# Altium PCB CH32H417MEU6-UHSIF-Bottom-R0.PcbDoc (part 2 of 2)
Units mil, origin at the board's own origin, x right, y up, seen from the top; angles counter-clockwise.
Board outline 2559.06 x 1771.65 mil, 4 copper layers (Top Layer, Layer 1, Layer 2, Bottom Layer), stack 23.756 mil thick; 66 components, 89 nets, 305 pads, 405 vias.
Unrouted connection lines stored in the file: 29.
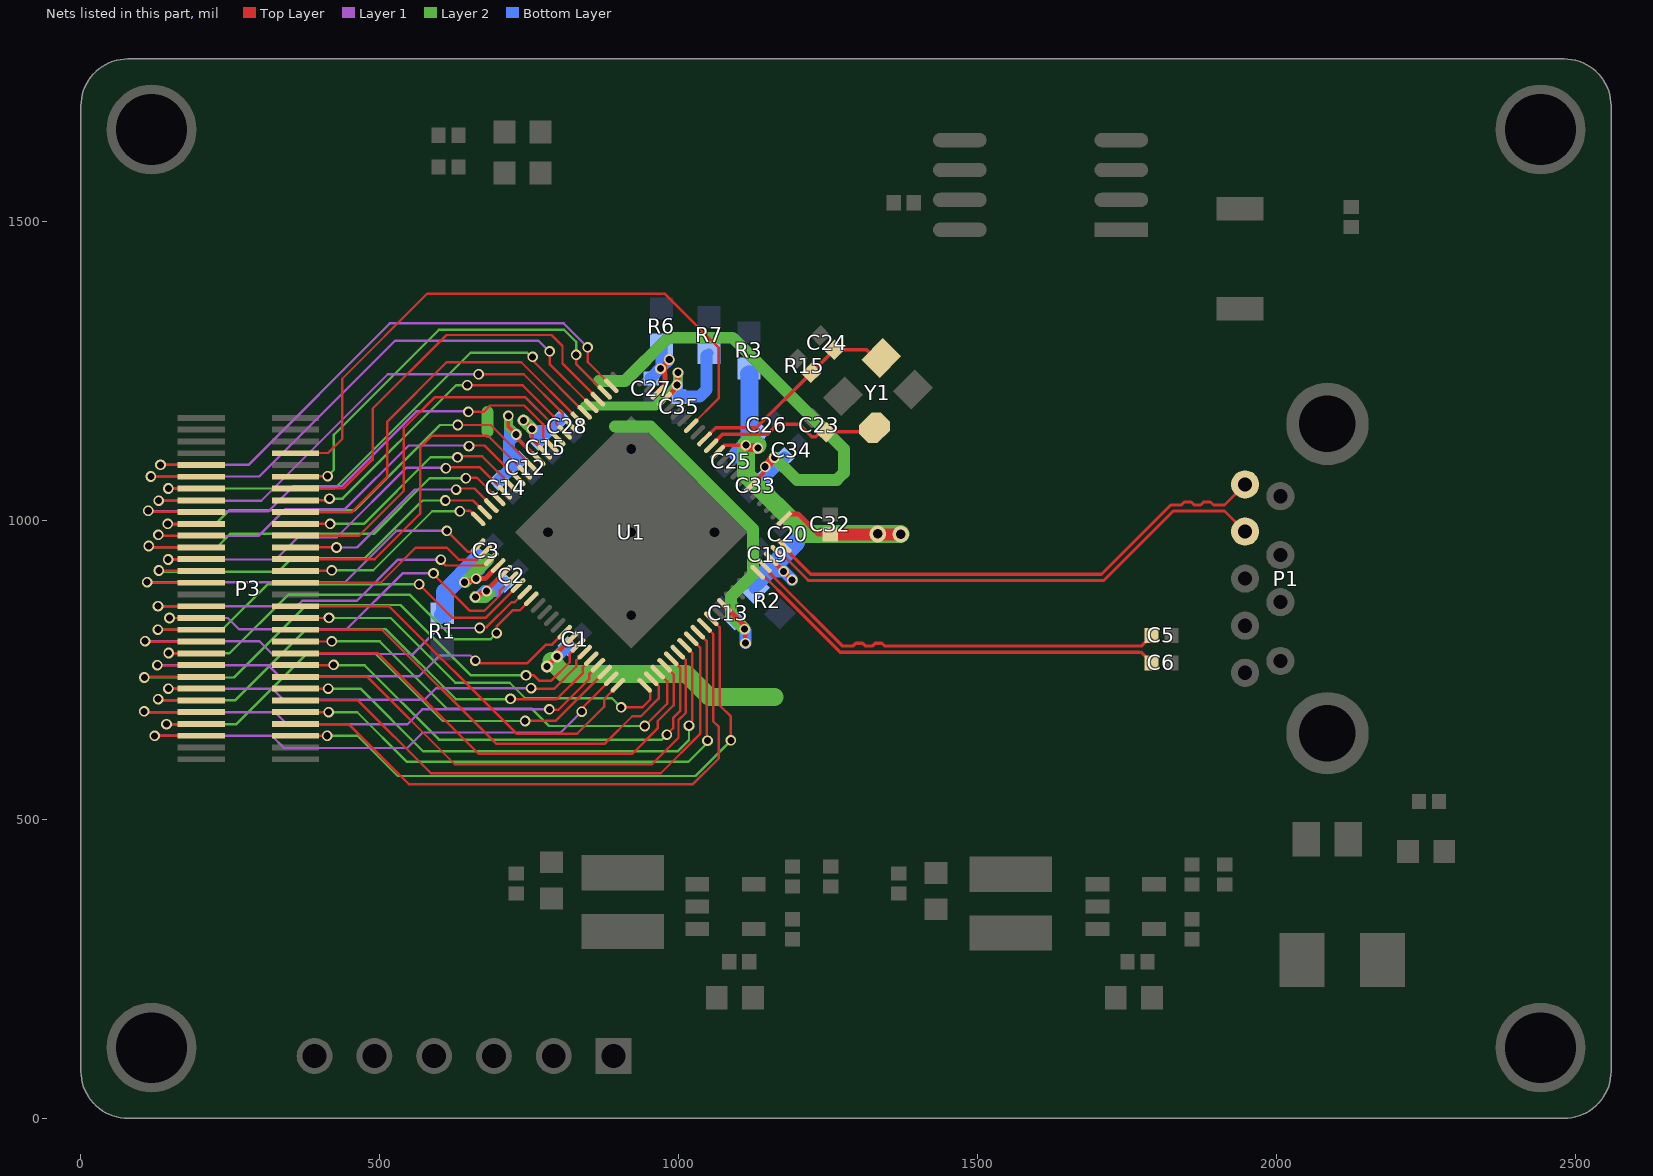
[diagram p4: the nets of this part, all layers, seen from the top]

## Via types
v1: diameter 17.72, hole 11.81, Top Layer to Bottom Layer, tented both sides, 276 vias
v2: diameter 19.68, hole 11.81, Top Layer to Bottom Layer, tented both sides, 94 vias
v3: diameter 28, hole 16, Top Layer to Bottom Layer, tented both sides, 23 vias
v4: diameter 23.62, hole 11.81, Top Layer to Bottom Layer, tented both sides, 12 vias

## Nets (pads, with @x,y where several pads share a name; then routed paths per layer and width w, separated by ;. In a path a pad name is that pad's centre, name@x,y a point inside that pad or via, vN(x,y) a via of type N, cw(c..) or ccw(c..) an arc to the next point about the centre after c; other vN are vias at no path point) (continued)
UFP3: P3.9 U1.24 | length 977.8
  Top Layer w4: v1(133.13,1092.73) 133.35,1092.52 P3.9@201.26,1092.52 ; v1(847.54,1289.26) 847.54,1264.55 U1.24@887,1225.09
  Layer 1 w4: v1(133.13,1092.73) 280.04,1092.73 516.77,1329.46 807.33,1329.46 v1(847.54,1289.26)
UFP4: P3.12 U1.25 | length 718.3
  Top Layer w4: P3.12@358.74,1072.83 359.31,1073.41 412.09,1073.41 v1(412.66,1073.98) ; v1(828.26,1276.76) 828.26,1261.55 U1.25@875.86,1213.96
  Layer 2 w4: v1(412.66,1073.98) 422.78,1084.09 422.78,1142.85 598.47,1318.54 808.31,1318.54 828.26,1298.59 v1(828.26,1276.76)
UFP5: P3.14 U1.26 | length 723.8
  Top Layer w4: P3.14@358.74,1053.15 439.37,1053.15 487.75,1101.54 487.75,1186.46 611.27,1309.97 787.03,1309.97 805.41,1291.6 805.41,1262.13 U1.26@864.72,1202.82
UFP6: P3.11 U1.27 | length 972.7
  Top Layer w4: v1(116.91,1073.29) 200.8,1073.29 P3.11@201.26,1072.83 ; v1(783.78,1282.63) 783.78,1261.5 U1.27@853.59,1191.68
  Layer 1 w4: v1(116.91,1073.29) 298.23,1073.29 525.38,1300.44 765,1300.44 782.81,1282.63 v1(783.78,1282.63)
UFP7: P3.13 U1.28 | length 889.9
  Top Layer w4: v1(146.21,1053.15) P3.13@201.26,1053.15 ; v1(755.45,1273.24) 758.07,1270.62 758.07,1264.93 U1.28@842.45,1180.55
  Layer 2 w4: v1(146.21,1053.15) 424.6,1053.15 651.62,1280.17 746.25,1280.17 753.17,1273.24 v1(755.45,1273.24)
UFP8: P3.18 U1.29 | length 669.5
  Top Layer w4: P3.18@358.74,1013.78 453.07,1013.78 512.46,1073.17 512.46,1165.18 611.56,1264.28 736.45,1264.28 U1.29@831.32,1169.41
UFP9: P3.15 U1.30 | length 888.6
  Top Layer w4: v1(130.07,1032.96) 200.75,1032.96 P3.15@201.26,1033.46 ; v1(665.11,1244.27) 740.53,1244.27 806.09,1178.71 806.09,1172.37 U1.30@820.18,1158.28
  Layer 1 w4: v1(130.07,1032.96) 130.35,1032.67 301.55,1032.67 513.15,1244.27 v1(665.11,1244.27)
UFP10: P3.16 U1.31 | length 567.7
  Top Layer w4: P3.16@358.74,1033.46 406.11,1033.46 406.31,1033.67 413.18,1033.67 v1(415.8,1036.29) ; v1(646.1,1226.01) 738.64,1226.01 795.09,1169.57 795.09,1161.1 U1.31@809.05,1147.14
  Layer 2 w4: v1(415.8,1036.29) 437.75,1036.29 627.47,1226.01 v1(646.1,1226.01)
UFP11: P3.22 U1.32 | length 634.3
  Top Layer w4: P3.22@358.74,974.41 358.97,974.18 465.1,974.18 539.9,1048.98 539.9,1153.93 591.57,1205.6 743.5,1205.6 784.09,1165.01 784.09,1149.83 U1.32@797.91,1136.01
UFP12: P3.17 U1.33 | length 878.4
  Top Layer w4: v1(112.66,1016.02) 114.64,1014.04 P3.17@201,1014.04 ; v1(647.99,1181.43) 673.67,1181.43 684.34,1192.1 741.44,1192.1 773.09,1160.45 773.09,1138.56 U1.33@786.78,1124.87
  Layer 1 w4: v1(112.66,1016.02) 113.74,1014.94 313.26,1014.94 355.15,1056.83 435.67,1056.83 561.01,1182.18 647.24,1182.18 v1(647.99,1181.43)
UFP13: P3.19 U1.36 | length 761.7
  Top Layer w4: v1(145.23,994.01) 145.31,994.09 P3.19@201.26,994.09 ; v1(630.17,1159.4) 685.44,1159.4 U1.36@753.37,1091.47
  Layer 2 w4: v1(145.23,994.01) 146.22,993.03 224.23,993.03 248.31,1017.11 458.36,1017.11 600.64,1159.4 v1(630.17,1159.4)
UFP14: P3.26 U1.37 | length 559.1
  Top Layer w4: P3.26@358.74,935.04 491.33,935.04 567.34,1011.05 567.34,1121.51 587.39,1141.56 680.56,1141.56 741.79,1080.33 U1.37@742.23,1080.33
UFP15: P3.21 U1.38 | length 761.3
  Top Layer w4: v1(129.61,975.67) 130.87,974.41 P3.21@201.26,974.41 ; v1(649.11,1123.94) 650.32,1125.15 675.15,1125.15 U1.38@731.1,1069.19
  Layer 1 w4: v1(129.61,975.67) 131.47,973.81 297.06,973.81 342.06,1018.81 441.92,1018.81 548.25,1125.15 647.9,1125.15 v1(649.11,1123.94)
UFP16: P3.20 U1.39 | length 428.3
  Top Layer w4: P3.20@358.74,994.09 v1(416.84,994.08) ; v1(629.85,1105.35) 631.57,1107.08 670.94,1107.08 U1.39@719.96,1058.06
  Layer 2 w4: v1(416.84,994.08) 473.32,994.08 584.6,1105.35 v1(629.85,1105.35)
UFP17: P3.25 U1.40 | length 700.4
  Top Layer w4: v1(145.93,934.46) 146.51,935.04 P3.25@201.26,935.04 ; v1(610.42,1087.1) 611.74,1088.43 667.32,1088.43 U1.40@708.83,1046.92
  Layer 1 w4: v1(145.93,934.46) 325.93,934.46 363.04,971.56 427.76,971.56 544.44,1088.24 609.28,1088.24 v1(610.42,1087.1)
UFP18: P3.23 U1.41 | length 736.8
  Top Layer w4: v1(113.44,957.05) 115.2,955.28 200.7,955.28 P3.23@201.26,954.72 ; v1(643.87,1070.38) 644.61,1071.12 662.36,1071.12 U1.41@697.69,1035.79
  Layer 2 w4: v1(113.44,957.05) 115.76,954.72 227.09,954.72 249.58,977.22 490.22,977.22 583.24,1070.25 617.4,1070.25 617.53,1070.38 v1(643.87,1070.38)
UFP19: P3.24 U1.42 | length 380.5
  Top Layer w4: P3.24@358.74,954.72 427.23,954.72 v1(427.41,954.55) ; v1(627.48,1051.46) 629.17,1053.14 658.07,1053.14 U1.42@686.56,1024.65
  Layer 1 w4: v1(427.41,954.55) 461.46,954.55 558.37,1051.46 v1(627.48,1051.46)
UFP20: P3.27 U1.43 | length 674.8
  Top Layer w4: v1(130.43,916.12) 131.19,915.35 P3.27@201.26,915.35 ; v1(609.4,1033.21) 655.73,1033.21 U1.43@675.42,1013.52
  Layer 2 w4: v1(130.43,916.12) 132.81,913.73 329.55,913.73 352.87,937.05 474.85,937.05 571.01,1033.21 v1(609.4,1033.21)
UFP21: P3.28 U1.44 | length 352.6
  Top Layer w4: P3.28@358.74,915.35 359.28,915.89 419,915.89 v1(419.54,916.43) ; v1(633.9,1015.13) 634.49,1015.72 650.94,1015.72 U1.44@664.28,1002.38
  Layer 2 w4: v1(419.54,916.43) 488.89,916.43 587.59,1015.13 v1(633.9,1015.13)
UFP22: P3.29 U1.45 | length 699.5
  Top Layer w4: v1(110.65,896.57) 111.55,895.67 P3.29@201.26,895.67 ; v1(611.97,982.42) 647.23,947.15 652.55,947.15 663.24,957.84 U1.45@664.28,957.84
  Layer 1 w4: v1(110.65,896.57) 110.95,896.27 441.3,896.27 527.45,982.42 v1(611.97,982.42)
UFP23: P3.30 U1.46 | length 354.4
  Top Layer w4: P3.30@358.74,895.67 501.44,895.67 559.8,954.03 612.08,954.03 632.13,933.98 662.7,933.98 U1.46@675.42,946.7
UFP24: P3.33 U1.47 | length 672.5
  Top Layer w4: v1(128.86,856.52) 129.07,856.3 P3.33@201.26,856.3 ; v1(602.05,934.38) 602.05,932.18 609.8,924.43 674.37,924.43 685.51,935.57 U1.47@686.56,935.57
  Layer 1 w4: v1(128.86,856.52) 361,856.52 370.07,865.58 461.57,865.58 530.37,934.38 v1(602.05,934.38)
UFP25: P3.35 U1.50 | length 725.6
  Top Layer w4: v1(148.11,836.61) P3.35@201.26,836.61 ; v1(589.69,911.34) 589.69,909.72 650.89,848.53 674.55,848.53 700.77,874.75 700.77,882.97 U1.50@719.96,902.16
  Layer 1 w4: v1(148.11,836.61) 245.6,836.61 264.51,817.71 444.44,817.71 538.07,911.34 v1(589.69,911.34)
UFP26: P3.37 U1.51 | length 752.8
  Top Layer w4: v1(128.58,817.27) 128.92,816.93 P3.37@201.26,816.93 ; v1(565.63,893.09) 621.88,836.84 676.91,836.84 711.77,871.7 U1.51@731.1,891.03
  Layer 2 w4: v1(128.58,817.27) 128.92,816.93 236.17,816.93 312.09,892.85 565.38,892.85 v1(565.63,893.09)
UFP27: P3.39 U1.52 | length 780.7
  Top Layer w4: v1(107.43,797.95) 108.14,797.24 P3.39@201.26,797.24 ; v1(666.98,819.87) 668.47,821.36 678.5,821.36 720.11,862.97 725.32,862.97 U1.52@742.23,879.89
  Layer 1 w4: v1(107.43,797.95) 298.33,797.95 319.92,776.36 555.27,776.36 598.78,819.87 v1(666.98,819.87)
UFP28: P3.41 U1.53 | length 767.1
  Top Layer w4: v1(146.76,778.11) 147.31,777.56 P3.41@201.26,777.56 ; v1(695.23,811.36) 695.71,811.84 695.71,823.02 722.02,849.33 733.94,849.33 U1.53@753.37,868.75
  Layer 2 w4: v1(146.76,778.11) 147.31,777.56 248.44,777.56 346.24,875.36 550.41,875.36 624.36,801.42 685.29,801.42 v1(695.23,811.36)
UFP29: P3.43 U1.58 | length 804.5
  Top Layer w4: v1(127.91,757.71) 128.46,757.16 200.54,757.16 P3.43@201.26,757.87 ; v1(659.72,765.38) 663.1,765.38 667.79,760.69 746.1,760.69 777.53,792.12 788.08,792.12 U1.58@809.05,813.08
  Layer 1 w4: v1(127.91,757.71) 128.07,757.87 313.16,757.87 331.99,739.04 565.13,739.04 600.03,773.94 651.16,773.94 v1(659.72,765.38)
UFP30: P3.45 U1.60 | length 956.8
  Top Layer w4: v1(106.05,737.12) 107.12,738.19 P3.45@201.26,738.19 ; v1(744.33,740.74) 757.67,740.74 767.02,731.39 786.34,731.39 817.45,762.5 817.45,776.94 U1.60@831.32,790.81
  Layer 2 w4: v1(106.05,737.12) 255.93,737.12 377.22,858.41 534.52,858.41 652.19,740.74 v1(744.33,740.74)
UFP31: P3.47 U1.61 | length 798.9
  Top Layer w4: v1(146.24,718.64) 146.38,718.5 P3.47@201.26,718.5 ; v1(752.83,719.22) 753.88,718.17 791.37,718.17 828.45,755.26 828.45,765.67 U1.61@842.45,779.67
  Layer 1 w4: v1(146.24,718.64) 146.43,718.45 320.29,718.45 338.69,700.05 574.7,700.05 593.87,719.22 v1(752.83,719.22)
UFP32: P3.49 U1.62 | length 930.6
  Top Layer w4: v1(129.11,700.82) 131.11,698.82 P3.49@201.26,698.82 ; v1(718.42,701.4) 719.05,700.77 795.31,700.77 839.45,744.91 839.45,754.4 U1.62@853.59,768.53
  Layer 2 w4: v1(129.11,700.82) 131.11,698.82 257.9,698.82 377.38,818.3 509.67,818.3 627.2,700.77 717.78,700.77 v1(718.42,701.4)
UFP33: P3.51 U1.63 | length 910.2
  Top Layer w4: v1(105.8,680.42) 107.09,679.13 P3.51@201.26,679.13 ; v1(783.37,683.81) 783.98,683.19 798.71,683.19 850.45,734.93 850.45,743.13 U1.63@864.72,757.4
  Layer 1 w4: v1(105.8,680.42) 107.09,679.13 324.5,679.13 345.01,658.63 545.65,658.63 570.84,683.81 v1(783.37,683.81)
UFP34: P3.53 U1.64 | length 920.5
  Top Layer w4: v1(143.16,659.17) 200.98,659.17 P3.53@201.26,659.45 ; v1(742.94,664.31) 743.63,665 794.6,665 U1.64@875.86,746.26
  Layer 2 w4: v1(143.16,659.17) 260.19,659.17 378.2,777.18 492.22,777.18 605.09,664.31 v1(742.94,664.31)
UFP35: P3.55 U1.65 | length 901.4
  Top Layer w4: v1(123.27,639.64) 123.4,639.76 P3.55@201.26,639.76 ; v1(837.56,680.14) 840.18,682.76 840.18,687.53 887,734.34 U1.65@887,735.13
  Layer 1 w4: v1(123.27,639.64) 319.08,639.63 339.4,619.31 545.84,619.31 571.64,645.12 802.54,645.12 v1(837.56,680.14)
UFP36: P3.34 U1.66 | length 668.5
  Top Layer w4: P3.34@358.74,856.3 515.46,856.3 728.55,643.2 829.98,643.2 875.21,688.43 875.21,701.07 U1.66@898.13,723.99
UFP37: P3.36 U1.67 | length 688.4
  Top Layer w4: P3.36@358.74,836.61 358.8,836.67 v1(414.83,836.73) v1(414.83,836.73) ; v1(903.38,687.19) 938.68,687.19 952.33,700.84 952.33,711.59 951.77,712.16 951.77,714.9 U1.67@942.67,723.99
  Layer 2 w4: v1(414.83,836.73) 414.95,836.61 518.1,836.61 626.34,728.37 717.19,728.37 743.2,702.36 888.21,702.36 v1(903.38,687.19)
UFP38: P3.38 U1.68 | length 755.8
  Top Layer w4: P3.38@358.74,816.93 503.76,816.93 694.17,626.52 876.43,626.52 922.18,672.27 936.49,672.27 966.13,701.91 966.13,722.81 U1.68@953.81,735.13
UFP39: P3.40 U1.69 | length 755.2
  Top Layer w4: P3.40@358.74,797.24 358.88,797.39 419.34,797.39 v1(419.48,797.53) ; v1(942.98,656) 980.5,693.52 980.5,730.71 U1.69@964.94,746.26
  Layer 2 w4: v1(419.48,797.53) 499.66,797.53 612.65,684.55 754.35,684.55 782.9,656 v1(942.98,656)
UFP40: P3.42 U1.70 | length 816
  Top Layer w4: P3.42@358.74,777.56 496.91,777.56 664.89,609.58 922.34,609.58 964.53,651.77 964.53,663.89 991.5,690.87 991.5,741.98 U1.70@976.08,757.4
UFP41: P3.44 U1.71 | length 819.1
  Top Layer w4: P3.44@358.74,757.87 422.18,757.87 v1(422.63,758.32) ; v1(979.83,641.56) 990.45,652.18 990.45,669.66 1002.5,681.71 1002.5,753.25 U1.71@987.22,768.53
  Layer 2 w4: v1(422.63,758.32) 423.38,757.57 474.49,757.57 598.73,633.34 971.57,633.34 v1(979.83,641.56)
UFP42: P3.46 U1.72 | length 873.3
  Top Layer w4: P3.46@358.74,738.19 479.17,738.19 625.3,592.06 955.12,592.06 999.45,636.39 999.45,665.93 1011.5,677.99 1011.5,766.52 U1.72@998.35,779.67
UFP43: P3.48 U1.73 | length 876.2
  Top Layer w4: P3.48@359.3,717.95 P3.48@358.74,718.5 v1(413.6,718.5) ; U1.73@1009.49,790.81 1022.6,777.69 1022.6,665.71 1016.89,660 v1(1016.89,656.51)
  Layer 2 w4: v1(413.6,718.5) 467.52,718.5 572.44,613.59 997.72,613.59 1016.89,632.76 v1(1016.89,656.51)
UFP44: P3.50 U1.74 | length 919.7
  Top Layer w4: P3.50@358.74,698.82 463.41,698.82 585.24,577 969.61,577 1035.5,642.88 1035.5,787.06 U1.74@1020.62,801.94
UFP45: P3.52 U1.75 | length 928.8
  Top Layer w4: P3.52@358.81,679.2 P3.52@358.74,679.13 v1(414.37,679.13) ; U1.75@1031.76,813.08 1046.5,798.33 1046.5,632.94 v1(1047.97,631.47)
  Layer 2 w4: v1(414.37,679.13) 462.09,679.13 545.31,595.91 1015.8,595.91 1047.97,628.08 v1(1047.97,631.47)
UFP46: P3.54 U1.76 | length 999.6
  Top Layer w4: P3.54@358.74,659.45 P3.54@358.81,659.38 ; P3.54@358.81,658.76 448.35,658.76 548.36,558.75 1023.56,558.75 1066.89,602.07 1066.89,654.09 1057.5,663.47 1057.5,809.6 U1.76@1042.89,824.21
UFP47: P3.56 U1.77 | length 998.1
  Top Layer w4: P3.56@358.74,639.76 v1(411.71,639.76) ; U1.77@1054.03,835.35 1068.5,820.88 1068.5,690.34 1087.07,671.76 v1(1087.07,631.85)
  Layer 2 w4: v1(411.71,639.76) 462.56,639.76 529.93,572.39 1027.61,572.39 v1(1087.07,631.85)
UFPCLK: P3.8 U1.15 | length 1064.3
  Top Layer w4: P3.8@358.74,1112.2 359.16,1112.63 413.51,1112.63 437.08,1136.21 437.08,1236.86 579.35,1379.12 975.75,1379.12 1066.89,1287.98 1066.89,1204.55 U1.15@1020.62,1158.28
USB_SSRX_n: P1.6 U1.87 | length 863.2
  Top Layer w5.1: U1.87@1165.38,946.7 1174.27,937.82 1178.26,937.82 1213.43,902.65 1216.39,899.69 1710.99,899.69 1826.87,1015.57 1912.62,1015.57 P1.6@1946.94,981.25
USB_SSRX_p: P1.5 U1.88 | length 863.1
  Top Layer w5.1: U1.88@1176.52,957.84 1185.4,948.96 1185.4,944.96 1220.58,909.79 1706.8,909.79 1822.69,1025.67 1840.33,1025.67 1845.3,1030.65 1856.82,1030.65 1861.8,1025.67 1872.71,1025.67 1877.69,1030.65 1889.2,1030.65 1894.18,1025.67 1912.62,1025.67 P1.5@1946.94,1059.99
USB_SSTX_n: C6.1 U1.84 | length 719
  Top Layer w5.1: U1.84@1131.98,913.3 1140.86,904.41 1144.85,904.41 1163.38,885.89 1165.47,883.8 1269.92,779.35 1770.48,779.35 ; 1773.44,779.35 1790.41,762.39 C6.1@1790.41,761.4
USB_SSTX_p: C5.1 U1.85 | length 721.6
  Top Layer w5.1: U1.85@1143.11,924.43 1151.99,915.55 1151.99,911.56 1167.56,895.99 1274.1,789.45 1291,789.45 1295.98,794.43 1307.49,794.43 1312.47,789.45 1323.38,789.45 1328.36,794.43 1339.88,794.43 1344.85,789.45 1773.29,789.45 ; 1773.44,789.45 1790.41,806.42 C5.1@1790.41,807.4
VDD12A: C19.2 C20.2 R2.1 U1.86 | length 226.7
  Top Layer w7: U1.86@1154.25,935.57 v1(1175.3,914.52) v1(1189.44,900.37)
  Bottom Layer w20: R2.1@1126.29,886.55 R2.1@1126.29,897.14 ; 1144.37,910.98 1147.91,914.52 v1(1175.3,914.52) ; C19.2@1160.1,930.95 1158.2,929.05 1160.76,929.05 v1(1175.3,914.52) ; v1(1189.44,900.37) v1(1175.3,914.52)
  Bottom Layer w30: R2.1@1128.41,895.02 1144.37,910.98 ; 1147.91,914.52 C19.2@1160.32,926.93 ; C19.2@1162.22,928.82 C20.2@1196.17,962.78
VDD33: C1.1 C25.2 C26.2 C32.2 R3.1 U1.1 U1.11 U1.59 | length 1305
  Top Layer w6: U1.11@1065.16,1113.74 1077.24,1125.81 v1(1111.98,1125.81)
  Top Layer w8: v2@780.81,757.92 781.76,757.92 v2(796.08,772.25) ; U1.59@820.18,801.94 798.32,780.08 v2@798.32,771.18 ; U1.1@1176.52,1002.38 1184.78,1010.64 1199.38,1010.64 1233.49,976.53 C32.2@1253.13,976.53 ; v2@798.28,771.14 v2@798.32,771.18
  Top Layer w15: v1(1111.98,1125.81) 1112.71,1125.81 1117.13,1121.4 1131.61,1121.4 v1(1132.13,1120.88)
  Top Layer w20: C32.2@1253.13,976.53 1299.15,976.53 1370.87,976.53 v3(1371.12,976.78)
  Layer 2 w30: 786.8,764.76 808.33,743.22 1012.64,743.22 1051.29,704.57 1160.07,704.57 ; v1@1131.65,1125.81 v1(1111.98,1125.81) 1111.98,1076.79 1211.55,977.21 1300.87,977.21 v3(1332.57,977.21) v3@1370.55,977.21
  Bottom Layer w20: v2(779.36,755.52) 813.09,789.25 C1.1@814.64,789.25
  Bottom Layer w30: C25.2@1099.17,1110.9 1118.3,1130.04 1118.3,1243.62 R3.1@1117.6,1244.32
VDD33A: C27.2 R6.1 U1.20 | length 171.4
  Top Layer w8: U1.20@964.94,1213.96 976.81,1225.82 976.81,1243.56 976.02,1244.36 ; 976.02,1260.32 976.02,1244.36 ; v1@983.37,1272.16 983.37,1268.6 969.34,1254.57 v1(969.34,1253.66) 969.34,1251.03 976.02,1244.36
  Bottom Layer w20: C27.2@952.82,1237.89 v1@970.84,1255.91 ; v1(969.34,1253.66) 970.84,1255.15 v1@970.84,1255.91 ; R6.1@970.84,1293.86 v1@970.84,1255.91 ; v1@982.9,1267.97 v1@970.84,1255.91
  other v1: 983.9,1268.97
VDDIO: C12.1 C14.1 C35.2 R7.1 U1.19 U1.35 | length 759.3
  Top Layer w6: v1(714.75,1174.78) 714.75,1156.76 727.86,1143.65 v1(727.86,1143.52) ; v1@727.92,1143.59 730.16,1141.35 730.16,1136.94 U1.35@764.5,1102.6
  Top Layer w8: U1.19@984.39,1211.13 997.05,1223.79 997.05,1227.41 998.91,1229.28 998.77,1229.42 998.77,1246.98 v1(998.62,1247.12)
  Layer 2 w15: v1(714.75,1174.78) 715.27,1174.26 715.27,1165.55 715.27,1156.85 727.86,1144.26 v1(727.86,1143.52) ; 842.39,1191.26 960.9,1191.26 998.91,1229.27 998.77,1229.41 998.77,1246.98 v1(998.62,1247.12)
  Bottom Layer w15: v1(714.75,1174.78) 715.27,1174.26 715.27,1156.85 ; 716.24,1115.34 715.27,1116.31 715.27,1156.85 ; v1(727.86,1143.52) 727.86,1144.26 715.27,1156.85 ; v1@998.62,1223.22 v1(998.62,1247.12) ; v1@998.91,1229.27 999.43,1228.75 999.43,1207.61 C35.2@1000.31,1206.73 ; R7.1@1046.29,1275.34 R7.1@1050.61,1279.67
  Bottom Layer w20: v1(727.86,1143.52) 716.24,1131.91 716.24,1115.34 ; C35.2@1000.31,1206.73 1034.57,1206.73 1046.29,1218.45 R7.1@1046.29,1275.34 ; 716.24,1115.34 716.24,1083.69 C14.1@699.07,1066.51 C12.1@732.07,1099.51 716.24,1115.34
  other v1: 996.91,1226.27
VDDK: C3.2 C33.2 C34.2 R1.1 U1.6 U1.48 | length 1112.9
  Top Layer w6: U1.6@1120.84,1058.06 1142.02,1079.24 1142.02,1087.33 v1(1144.26,1089.57)
  Top Layer w8: v1@643.47,897.12 645.33,898.98 654.91,898.98 658.44,902.51 v1(661.07,902.51) 675.77,902.51 U1.48@697.69,924.43
  Top Layer w15: v1(1144.26,1089.57) v1(1159.8,1105.11)
  Layer 2 w20: v1@643.47,897.12 654.96,908.62 680.78,934.43 ; 679.73,1148.17 679.73,1159.8 679.73,1180.83 ; 866.29,1232.98 909.95,1232.98 982.31,1305.34 1090.05,1305.34 1276.08,1119.3 1276.08,1079.35 1264.37,1067.63 1197.28,1067.63 v1(1159.8,1105.11)
  Bottom Layer w20: v1@655.92,907.66 666.3,918.04 666.3,933.63 667,934.33 667,936.89 C3.2@666.3,937.59 ; C33.2@1140.65,1069.42 C34.2@1176.66,1105.44
  Bottom Layer w30: R1.1@605.33,841.21 608.55,844.42 608.55,879.83 C3.2@664.89,936.17
  other v1: 641.35,896.42
VIO18: C2.1 C13.1 C15.2 C28.2 U1.34 U1.49 U1.79 | length 984.6
  Top Layer w6: v1(740.19,1167.22) 740.32,1167.22 754.59,1152.95 v1(754.72,1152.95) 754.72,1134.65 U1.34@775.64,1113.74
  Top Layer w8: v1(659.77,871.51) 662.4,871.51 670.63,879.74 676.54,879.74 v1(678.39,881.6) 678.39,882.78 708.83,913.21 U1.49@708.83,913.3 ; U1.79@1076.3,857.62 v1@1108.27,825.65 ; v1(1110.13,818.16) 1108.27,820.02 v1@1108.27,825.65 ; v1(1111.5,794.5) 1111.02,794.98 1111.02,822.9 v1@1108.27,825.65
  Layer 2 w20: v1(659.77,871.51) 676.43,871.51 v1@682.45,877.54 ; v1(740.19,1167.22) 740.45,1167.22 v1(754.72,1152.95) ; 893.02,1156.62 952.69,1156.62 1124.02,985.29 1124.02,908.94 1087.02,871.93 1087.02,841.27 v1(1110.13,818.16)
  Bottom Layer w20: v1(659.77,871.51) 665.49,871.51 675.58,881.6 v1(678.39,881.6) 694.59,881.6 C2.1@708.44,895.45 ; v1(740.19,1167.22) 747.33,1160.09 747.59,1160.09 v1(754.72,1152.95) v1@758.13,1149.54 ; C15.2@765.7,1133.14 C15.2@766.39,1133.84 ; C28.2@801.39,1168.84 782.09,1149.54 ; C13.1@1094.58,833.01 v1@1109.44,818.16 ; v1(1110.13,818.16) v1@1109.44,818.16 ; v1(1111.5,794.5) 1111.5,816.09 1109.78,817.81 v1@1109.44,818.16 ; v1@758.13,1149.54 782.09,1149.54 ; v1@758.13,1149.54 759.68,1148 759.68,1143.12 766.39,1136.4 C15.2@766.39,1133.84 ; C15.2@766.39,1133.84 782.09,1149.54
XI: C23.2 U1.12 Y1.1 | length 303
  Top Layer w6: U1.12@1054.03,1124.87 1072.83,1143.67 1147.65,1143.67 1164.64,1160.65 1201.52,1160.65 1222.37,1139.81 1228.89,1139.81 1234.58,1145.5 1240.41,1145.5 1242.74,1147.83 1320.56,1147.83 Y1.1@1327.41,1154.68
XO: C24.2 R15.2 U1.13 Y1.3 | length 363.8
  Top Layer w6: U1.13@1042.89,1136.01 1061.56,1154.67 1129.69,1154.67 R15.2@1221.48,1246.47 C24.2@1260.38,1285.36 1261.07,1286.05 1273.53,1286.05 1274.23,1285.36 1313.92,1285.36 1327.67,1271.6 Y1.3@1338.55,1271.6
pads on no net: ?.0 U1.7 U1.8 U1.9 U1.10 U1.21

## Polygon pours and split planes (outlines as drawn)
GND on Layer 2 "GND" (solid, remove dead copper, pour order 15): -4.21,1780.03 -4.21,0 2559.06,0 2559.06,1770.64
VIO18 on Layer 2 "VIO18" (solid, remove dead copper, pour order 14): 747.45,1043.62 846.39,1142.55 947.08,1142.55 1107.83,981.8 1107.83,937 1070.94,900.1 1070.94,801.03 1086.49,785.48 1114.99,785.48 1123.14,793.62 1123.14,873.95 1145.89,896.7 1145.89,1002.02 977.37,1170.54 762.23,1170.54 749.03,1183.74 735.27,1183.74 724.03,1172.51 724.03,1169.7 724.93,1162.84 748.55,1139.21 749.18,1121.7 708.83,1081.34 708.83,891.03 701.33,883.53 648.34,883.53 644.16,879.34 644.16,859.8 648.9,855.05 732.1,855.05 747.45,870.41
VDDK on Layer 2 "VDDK" (solid, remove dead copper, pour order 12): 628.36,894.63 628.36,910 640.64,922.28 664.15,922.28 666.6,924.73 666.6,1095.82 666.6,1219.43 704.15,1256.98 914.34,1256.98 980.5,1323.13 1119.99,1323.13 1295.48,1147.64 1295.48,1054.05 1293.61,1052.17 1172.24,1052.17 1133.38,1091.03 1132.77,1094.63 1132.77,1099.66 1152.74,1119.63 1174.62,1119.63 1207.69,1086.56 1229.19,1086.56 1240.24,1097.62 1240.24,1124.55 1080.18,1284.61 981.38,1284.61 914.73,1217.96 852.64,1217.96 847.27,1223.33 722.68,1223.33 700.84,1201.49 700.84,1108.49 700.84,909.5 680.86,889.53 633.46,889.53
VDD33 on Layer 2 "VDD33" (solid, remove dead copper, pour order 10): 1275.84,781.9 1275.84,877.51 1297.56,899.23 1373.32,899.23 1386.14,912.05 1386.14,985.3 1381.36,990.08 1225.34,990.08 1132.77,1082.65 1132.77,1106.61 1134.77,1108.6 1138.01,1108.6 1148.99,1119.58 1148.99,1143.54 1143.25,1149.28 1087.1,1149.28 1083.59,1145.78 1083.59,1074.29 1218.26,939.62 1218.26,799.58 1153.48,734.8 1063.79,734.8 1022.18,776.4 833.24,776.4 825.98,783.66 769.08,783.66 761.82,776.4 761.82,749.15 786.48,724.48 1000.47,724.48 1045.84,679.11 1173.05,679.11
VDDIO on Layer 2 "VDDIO" (solid, remove dead copper, pour order 13): 710.09,1122.25 738.1,1122.25 743.24,1127.39 743.24,1142.91 727.06,1159.09 727.06,1173.27 742.14,1188.35 810.65,1188.35 820.89,1178.11 977.08,1178.11 1013.71,1214.74 1013.71,1250.73 1007.18,1257.26 992.66,1257.26 986.04,1250.64 986.04,1236.87 960.7,1211.53 849.13,1211.53 845.93,1214.74 723.18,1214.74 704.19,1195.75 704.19,1125.07
+5V on Layer 2 "+5V" (solid, remove dead copper, pour order 0): 1992.04,428.84 1996.82,433.62 2063.94,433.62 2081.48,416.08 2081.48,201.02 2057.79,177.32 1003.11,177.32 987.53,195.12 987.53,270.41 998.85,283.09 1954.01,283.09 1992.04,321.12
GND on Bottom Layer "GND" (solid, remove dead copper, pour order 17): 7.41,1771.65 7.41,0 2559.06,0 2559.06,1771.65
3V3 on Bottom Layer "3V3" (solid, remove dead copper, pour order 16): 989.55,1511 1002.29,1523.74 1302.72,1523.74 1326.54,1547.55 1410.16,1547.55 1420.02,1557.41 1420.02,1597.48 1408.46,1609.04 840.41,1609.04 796.02,1564.65 744.93,1515.6 458.68,1515.6 453.9,1509.32 453.9,1284.51 442.44,1273.05 150.32,1273.05 129.84,1252.57 129.84,1172.01 135.57,1166.28 436.85,1166.28 465.28,1137.85 465.28,472.49 607.85,329.91 665.46,329.91 687.81,352.26 687.81,418.81 543.07,563.55 543.07,1405.32 558.63,1420.16 789.6,1420.16 885.04,1515.6 927.97,1515.6 949.68,1493.89 949.68,1343.54 957.06,1336.15 1016.89,1336.15 1031.81,1321.23 1083.25,1321.23 1106.33,1298.16 1142.66,1298.16 1149.07,1304.57 1149.07,1340.24 1124.48,1364.83 1033.25,1364.83 1015.28,1382.8 992.32,1382.8 989.55,1385.57
1V2 on Bottom Layer "1V2" (solid, remove dead copper, pour order 11): 1921.38,416.85 1923.88,419.35 1923.88,456.36 1904.98,456.65 1544.39,456.65 1440.69,558.28 1295.74,558.28 1228.93,625.09 1228.93,838.84 1198.87,868.9 1168.58,868.9 1146.01,846.33 1146.01,836.28 1176.7,805.59 1176.7,540.66 1118.41,482.37 735.59,482.37 635.36,582.6 635.36,793.08 625.65,802.78 585.39,802.78 574.41,791.8 574.41,564.73 724.71,414.43 914.32,414.43 1006.1,414.18 1162.18,414.18 1196.91,448.9 1312.42,448.9 1344.47,416.85
NetF1_1 on Bottom Layer "NetF1_1" (solid, remove dead copper, pour order 2): 2163.63,568.73 2111.24,516.35 2111.24,427.44 2123.51,415.17 2242.28,415.17 2256.54,429.43 2256.54,808.06 2251.11,813.49 2006.24,813.49 1980.56,787.8 1980.56,738.05 1990.12,729.02 2139.43,729.02 2163.63,704.83
GND on Top Layer "GND" (solid, remove dead copper, pour order 18): 2559.06,0 -0.09,0 -0.09,1771.65 2559.06,1771.65
3V3 on Top Layer "3V3" (solid, remove dead copper, pour order 8): 399.74,1166.12 150.86,1166.12 126.14,1190.84 126.14,1269.12 129.13,1272.11 162.64,1272.11 171.51,1263.24 171.51,1204.6 189.25,1186.86 395.19,1186.86 399.74,1182.31
GND on Layer 1 "GND" (solid, remove dead copper, pour order 9): 4.79,1771.84 4.79,0 2559.06,0 2559.06,1765.3

## Keep-outs
Keep-Out Layer:
  the board outline again, w10

## Other copper
Top Layer:
  rectangle net GND: 293.8,1125.06 413.11,1155.75
  rectangle net NetF1_1: 2095.38,405.75 2182.35,527.13
  pour cut-out: 919.81,1222.64 674.43,977.26 916.76,734.92 1160.81,978.98
  region net +5V: 1810.69,245.25 1946.2,245.25 1992.68,291.73 1992.68,497.91 2004.28,509.51 2064.82,509.51 2075.73,498.6 2075.73,195.26 2057.44,176.97 1816.62,176.97 1810.69,182.89
  region net GND: 313.72,1155.96 307.85,1150.09 307.85,1127.13 324.18,1127.13 327.08,1129.31 327.08,1155.96
  pour cut-out: 1522.03,610.92 1255.96,610.92 1125.48,741.39 1125.48,843.37 1086.37,882.49 1086.37,905.24 1161.92,980.79 1702.22,980.79 1836.75,1115.32 2040.69,1115.52 2169.99,986.22 2169.99,767.95 2012.64,610.6 2002.25,610.6
  pour cut-out: 1481.79,423.95 1481.79,278.31 1633.62,278.31 1633.62,423.39
  pour cut-out: 829.76,432.19 829.76,286.55 981.58,286.55 981.58,431.62
  region net 1V2: 1626.8,380.87 1478.93,380.87 1463.62,396.18 1359.23,396.18 1345.35,410.06 1345.35,444.15 1367.81,466.61 1618.49,466.61 1629.42,455.68 1629.42,383.49
  region net 3V3: 703.61,400.96 693.15,390.51 693.15,313.08 688.78,308.7 644.69,308.7 636.28,317.11 636.28,447.34 648.73,459.79 709.3,459.87 964.3,459.87 976.02,448.15 976.02,390.62 972.11,384.23 831.22,384.23 814.48,400.96
  region net NetL1_1: 1049.67,328.42 993.62,328.42 980.9,341.14 844.97,341.14 839.51,335.68 839.51,288.26 855.6,272.17 1028.03,272.17 1051.25,295.39 1051.25,326.13
  region net NetL2_1: 1716.19,329.1 1654.5,329.1 1644.95,338.64 1492.25,338.64 1487.14,333.53 1487.14,287.86 1508.27,266.72 1688.58,266.72 1718.55,296.7 1718.55,327.09
  region net +5V: 1772.51,327.14 1772.51,182.91 1778.45,176.97 1877.9,176.97 1881.87,180.93 1881.87,224.12 1867.6,238.38 1830.75,238.38 1817.68,251.46 1817.68,326.74 1813.72,330.7 1776.47,330.7
  region net +5V: 1163.63,240.19 1243.8,240.19 1248.84,235.16 1248.84,183.28 1244.35,178.78 1111.33,178.78 1105.39,184.72 1105.39,328.95 1109.35,332.51 1146.6,332.51 1150.56,328.55 1150.56,253.27
Layer 1:
  region net GND: 709.94,999.2 924.45,784.69 1127.26,987.51 912.76,1202.02
Layer 2:
  region net GND: 913.33,1126.38 938.41,1126.38 1096.17,968.61 1096.17,960.32 1095.35,960.32 932.96,797.92 924.33,797.92 791,931.25 791,956.17 774.14,973.04 774.14,990.93 804.18,1020.97
Bottom Layer:
  region net GND: 940.25,1146.18 1092.22,994.21 1092.22,976.03 924.94,808.75 892.45,808.75 753.38,947.82 753.38,995.53 918.6,1160.75

## Silkscreen, mask and mechanical layers (free items; w line width, h text height)
Top Overlay:
  text "RESET" at 2061.96,1347.19 h35 r90
  text "SWCLK" at 767.17,339.92 h35 r270
  text "SWDIO" at 666.41,334.09 h35 r270
  text "3V3" at 464.9,269.95 h35 r270
  text "GND" at 565.66,269.95 h35 r270
  text "TX6" at 867.92,269.95 h35 r270
  text "5V" at 364.15,234.96 h35 r270
  text "CH32H417MEU6-UHSIF-Bottom-R0-1v1" at 1172.63,26.78 h35
Mechanical 1:
  the board outline again, w10

## Text inside footprints (layer, text, board x,y; h text height)
LED1: Top Overlay "+" at 2318.11,457.26 h40 r270
LED2: Top Overlay "+" at 806.88,1660.28 h40 r270
LED3: Top Overlay "+" at 806.88,1591.63 h40 r270
P1: Bottom Overlay "V" at 2135.99,780.72 h31.5 r180; Bottom Overlay "D-" at 2135.99,872.72 h31.5 r180; Bottom Overlay "D+" at 2135.99,952.72 h31.5 r180; Bottom Overlay "G" at 2135.99,1052.72 h31.5 r180; Bottom Overlay "R-" at 2046.99,1070.72 h31.5 r180; Bottom Overlay "R+" at 2046.99,999.72 h31.5 r180; Bottom Overlay "G" at 2046.99,917.72 h31.5 r180; Bottom Overlay "T-" at 2046.99,835.72 h31.5 r180; Bottom Overlay "T+" at 2046.99,759.72 h31.5 r180